# Altium PCB DC_Switch_2_5V.PcbDoc (part 1 of 2)
Units mm, origin at the board's own origin, x right, y up, seen from the top; angles counter-clockwise.
Board outline 119.38 x 91.44 mm, 2 copper layers (Top Layer, Bottom Layer); 24 components, 104 nets, 306 pads, 149 vias.
Unrouted connection lines stored in the file: 1.
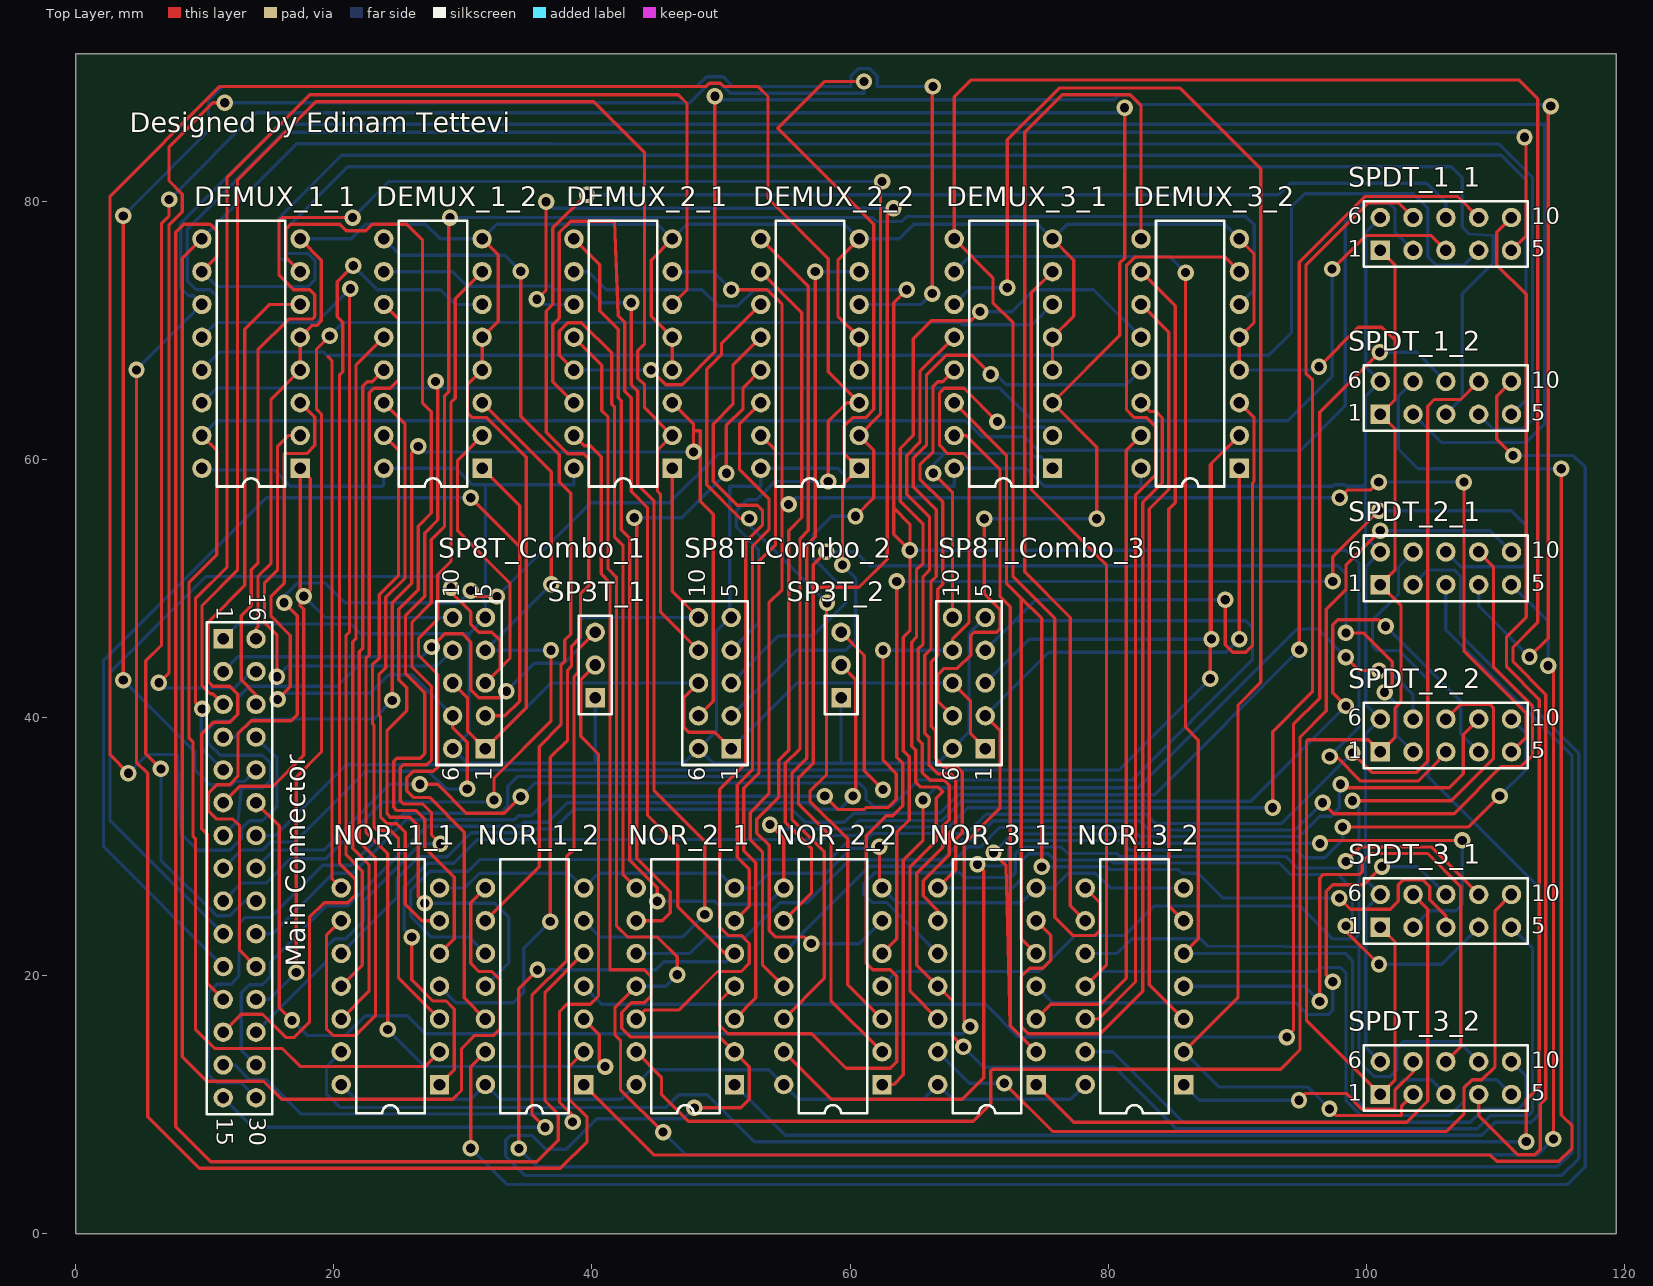
[diagram p0: Top Layer view]
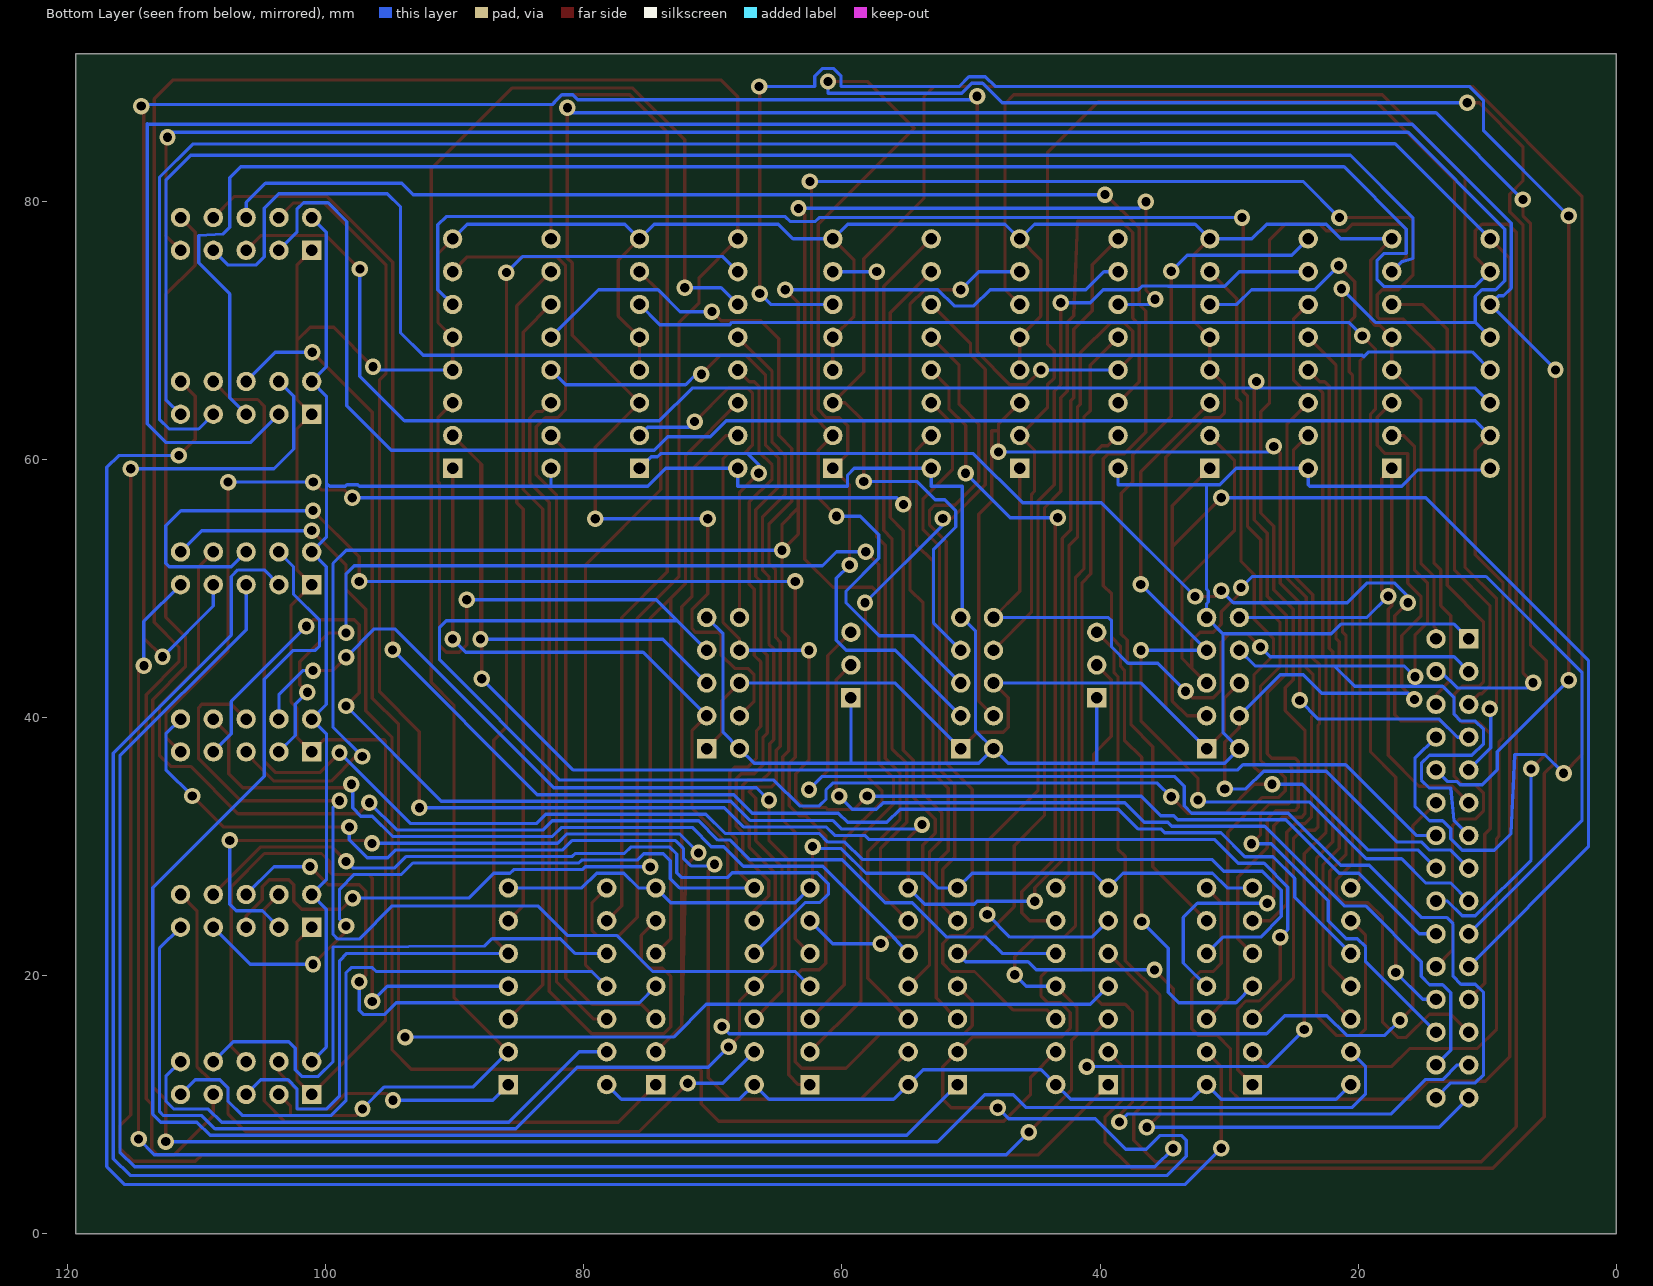
[diagram p1: Bottom Layer view, seen from below]

## Layer stack, top to bottom
Top Solder: solder mask 0.0102, Solder Resist, Dk 3.5
Top Layer: signal copper 0.0356
Dielectric 1: dielectric 0.32, FR-4, Dk 4.8
Bottom Layer: signal copper 0.0356
Bottom Solder: solder mask 0.0102, Solder Resist, Dk 3.5

## Board outline
0,0 119.38,0 119.38,91.44 0,91.44

## Design rules (kind name [scope] priority, off if disabled: settings)
Clearance [All] p1: gap=0.254
PolygonConnect [All] p1: connectstyle=Relief reliefconductorwidth=0.254 reliefentries=4 polygonreliefangle="90 Angle" airgapwidth=0.254
RoomDefinition DC_Switch_2 [InComponentClass('DC_Switch_2')] p1: confinementstyle=ConfineIn formatcopy=TRUE lockcomponents=FALSE outline 0,0 119.38,0 119.38,91.44 0,91.44
RoutingVias [All] p1: holewidth=0.711 width=1.27 viastyle="Through Hole" minholewidth=0.711 minwidth=1.27 maxholewidth=0.711 maxwidth=1.27
SolderMaskExpansion [All] p1: expansion=0.102
Width [All] p1: maxlimit=0.254 minlimit=0.254 preferedwidth=0.254
30 further rules are at their usual default settings.

## Components (designator, comment, footprint, x,y, rotation, side; value= is the part's Value field where it differs from the comment)
DEMUX_1_1 "CD54HCT238" J016D 13.589,68.199 r90 top
DEMUX_1_2 "CD54HCT238" J016D 27.686,68.199 r90 top
DEMUX_2_1 "CD54HCT238" J016D 42.418,68.199 r90 top
DEMUX_2_2 "CD54HCT238" J016D 56.896,68.199 r90 top
DEMUX_3_1 "CD54HCT238" J016D 71.882,68.199 r90 top
DEMUX_3_2 "CD54HCT238" J016D 86.36,68.199 r90 top
"Main Connector" "Arduino Pins" HDR2X15_CEN 11.43,46.101 r270 top
NOR_1_1 "SN74HC02N" N014 24.384,19.177 r90 top
NOR_1_2 "SN74HC02N" N014 35.56,19.177 r90 top
NOR_2_1 "SN74HC02N" N014 47.244,19.177 r90 top
NOR_2_2 "SN74HC02N" N014 58.674,19.177 r90 top
NOR_3_1 "SN74HC02N" N014 70.612,19.177 r90 top
NOR_3_2 "SN74HC02N" N014 82.042,19.177 r90 top
SP3T_1 "Cntrl" HDR1X3 40.259,41.529 r90 top
SP3T_2 "Cntrl" HDR1X3 59.309,41.529 r90 top
SP8T_Combo_1 "Cntrl" HDR2X5_CEN 31.75,37.592 r90 top
SP8T_Combo_2 "Cntrl" HDR2X5_CEN 50.8,37.592 r90 top
SP8T_Combo_3 "Cntrl" HDR2X5_CEN 70.485,37.592 r90 top
SPDT_1_1 "Cntrl" HDR2X5_CEN 101.092,76.2 r0 top
SPDT_1_2 "Cntrl" HDR2X5_CEN 101.092,63.5 r0 top
SPDT_2_1 "Cntrl" HDR2X5_CEN 101.092,50.292 r0 top
SPDT_2_2 "Cntrl" HDR2X5_CEN 101.092,37.338 r0 top
SPDT_3_1 "Cntrl" HDR2X5_CEN 101.092,23.749 r0 top
SPDT_3_2 "Cntrl" HDR2X5_CEN 101.092,10.795 r0 top

## Footprints (in the part's own frame and the unit in brackets; to place one, negate y for a bottom-side part, rotate by r counter-clockwise, add the part's x,y. Pads: shape width x height; smd on the part's side, far side on the other; paste and mask are expansions set on the pad)
HDR1X3 [mm] "Connector; Header; 3 Position"
  rect 1.5x1.5 hole 0.9: 1(0,0)
  round 1.5 hole 0.9: 2(2.54,0) 3(5.08,0)
  silkscreen extent -1.27,-1.27 6.35,1.27
HDR2X5_CEN [mm] "Connector; Header; 5x2 Position"
  rect 1.5x1.5 hole 0.9: 1(0,0)
  round 1.5 hole 0.9: 2(2.54,0) 3(5.08,0) 4(7.62,0) 5(10.16,0) 6(0,2.54) 7(2.54,2.54) 8(5.08,2.54) 9(7.62,2.54) 10(10.16,2.54)
  silkscreen extent -1.27,-1.27 11.43,3.81
HDR2X15_CEN [mm] "Connector; Header; 15x2 Position"
  rect 1.5x1.5 hole 0.9: 1(0,0)
  round 1.5 hole 0.9: 2(2.54,0) 3(5.08,0) 4(7.62,0) 5(10.16,0) 6(12.7,0) 7(15.24,0) 8(17.78,0) 9(20.32,0) 10(22.86,0) 11(25.4,0) 12(27.94,0) 13(30.48,0) 14(33.02,0) 15(35.56,0) 16(0,2.54) 17(2.54,2.54) 18(5.08,2.54) 19(7.62,2.54) 20(10.16,2.54) 21(12.7,2.54) 22(15.24,2.54) 23(17.78,2.54) 24(20.32,2.54) 25(22.86,2.54) 26(25.4,2.54) 27(27.94,2.54) 28(30.48,2.54) 29(33.02,2.54) 30(35.56,2.54)
  silkscreen extent -1.27,-1.27 36.83,3.81
J016D [mm] "DIP; 16 Leads; Row Spacing 7.62 mm; Pitch 2.54 mm"
  rect 1.5x1.5 hole 0.9: 1(-8.89,-3.81)
  round 1.5 hole 0.9: 2(-6.35,-3.81) 3(-3.81,-3.81) 4(-1.27,-3.81) 5(1.27,-3.81) 6(3.81,-3.81) 7(6.35,-3.81) 8(8.89,-3.81) 9(8.89,3.81) 10(6.35,3.81) 11(3.81,3.81) 12(1.27,3.81) 13(-1.27,3.81) 14(-3.81,3.81) 15(-6.35,3.81) 16(-8.89,3.81)
  silkscreen extent -10.3,-2.65 10.3,2.65
N014 [mm] "DIP; 14 Leads; Row Spacing 7.62 mm; Pitch 2.54 mm"
  rect 1.5x1.5 hole 0.9: 1(-7.62,-3.81)
  round 1.5 hole 0.9: 2(-5.08,-3.81) 3(-2.54,-3.81) 4(0,-3.81) 5(2.54,-3.81) 6(5.08,-3.81) 7(7.62,-3.81) 8(7.62,3.81) 9(5.08,3.81) 10(2.54,3.81) 11(0,3.81) 12(-2.54,3.81) 13(-5.08,3.81) 14(-7.62,3.81)
  silkscreen extent -9.85,-2.65 9.85,2.65

## Part data
DEMUX_1_1 DEMUX_1_2 DEMUX_2_1 DEMUX_2_2 DEMUX_3_1 DEMUX_3_2: library part SN54HC238J, "3-Line to 8-Line Decoder / Demultiplexer"
"Main Connector": library part "Header 15X2A", "Header, 15-Pin, Dual row"
NOR_1_1 NOR_1_2 NOR_2_1 NOR_2_2 NOR_3_1 NOR_3_2: "Quadruple 2-Input Positive-NOR Gate"
SP3T_1 SP3T_2: library part "Header 3", "Header, 3-Pin"
SP8T_Combo_1 SP8T_Combo_2 SP8T_Combo_3 SPDT_1_1 SPDT_1_2 SPDT_2_1 SPDT_2_2 SPDT_3_1 SPDT_3_2: library part "Header 5X2A", "Header, 5-Pin, Dual row"

## Via types
v1: diameter 1.27, hole 0.711, Top Layer to Bottom Layer, 149 vias

## Nets (pads, with @x,y where several pads share a name; then routed paths per layer and width w, separated by ;. In a path a pad name is that pad's centre, name@x,y a point inside that pad or via, vN(x,y) a via of type N, cw(c..) or ccw(c..) an arc to the next point about the centre after c; other vN are vias at no path point)
GND: NOR_1_1.7 NOR_1_2.7 NOR_2_1.7 NOR_2_2.7 NOR_3_1.7 NOR_3_2.7 | length 65.9
  Top Layer w0.254: v1(62.281,29.997) 62.281,27 NOR_2_2.7@62.484,26.797
  Bottom Layer w0.254: NOR_1_1.7@28.194,26.797 30.148,26.797 31.291,27.94 38.227,27.94 NOR_1_2.7@39.37,26.797 40.513,27.94 49.911,27.94 NOR_2_1.7@51.054,26.797 52.578,26.797 53.721,27.94 58.141,27.94 60.046,29.845 62.128,29.845 v1(62.281,29.997) ; NOR_2_2.7@62.484,26.797 63.627,25.654 73.279,25.654 NOR_3_1.7@74.422,26.797 75.768,26.797 76.911,27.94 79.019,27.94 80.162,26.797 NOR_3_2.7@85.852,26.797
NetDEMUX_1_1_1: "Main Connector.6" DEMUX_1_1.1 SP8T_Combo_1.10 | length 52.8
  Top Layer w0.254: 11.43,33.401 12.7,34.671 15.291,34.671 17.684,37.064 17.684,48.387 17.399,48.672 DEMUX_1_1.1@17.399,59.309 18.186,58.522 18.186,49.911 v1(17.678,49.403)
  Bottom Layer w0.254: v1(17.678,49.403) 19.329,47.752 SP8T_Combo_1.10@29.21,47.752
NetDEMUX_1_1_2: "Main Connector.7" DEMUX_1_1.2 SP8T_Combo_1.9 | length 64.1
  Top Layer w0.254: v1(15.596,43.155) 15.596,46.406 14.63,47.371 14.63,50.419 15.646,51.435 15.646,61.036 16.459,61.849 DEMUX_1_1.2@17.399,61.849
  Bottom Layer w0.254: 11.43,30.861 12.573,32.004 12.827,34.532 14.478,34.532 15.101,35.155 15.101,36.449 14.478,37.072 11.188,37.072 10.287,37.973 10.287,39.091 10.922,39.726 12.04,39.726 12.573,40.259 12.573,41.529 13.462,42.418 20.269,42.418 21.844,43.993 ; v1(15.596,43.155) 16.434,43.993 21.844,43.993 ; SP8T_Combo_1.9@29.21,45.212 27.991,43.993 21.844,43.993
NetDEMUX_1_1_3: "Main Connector.8" DEMUX_1_1.3 SP8T_Combo_1.7 | length 71.3
  Top Layer w0.254: v1(15.646,41.402) 16.625,42.381 16.625,46.355 15.138,47.842 15.138,49.403 16.154,50.419 16.154,60.452 17.895,60.452 18.53,61.087 18.53,63.258 DEMUX_1_1.3@17.399,64.389 ; SP8T_Combo_1.7@29.21,40.132 29.21,39.218 30.341,38.087 v1(30.341,34.468)
  Bottom Layer w0.254: 11.43,28.321 12.839,29.73 14.465,29.73 15.088,30.353 16.993,30.353 22.479,35.839 27.33,35.839 28.702,34.468 v1(30.341,34.468) ; v1(15.646,41.402) 16.129,41.885 22.835,41.885 24.257,43.307 26.035,43.307 SP8T_Combo_1.7@29.21,40.132
NetDEMUX_1_1_4: "Main Connector.16" DEMUX_1_1.4 DEMUX_1_1.5 DEMUX_1_1.8 DEMUX_1_2.4 DEMUX_1_2.5 DEMUX_1_2.8 DEMUX_2_1.4 DEMUX_2_1.5 DEMUX_2_1.8 DEMUX_2_2.4 DEMUX_2_2.5 DEMUX_2_2.8 DEMUX_3_1.4 DEMUX_3_1.5 DEMUX_3_1.8 DEMUX_3_2.4 DEMUX_3_2.5 DEMUX_3_2.8 SP8T_Combo_1.1 SP8T_Combo_1.8 SP8T_Combo_2.1 SP8T_Combo_2.8 SP8T_Combo_3.1 SP8T_Combo_3.8 SPDT_1_1.1 SPDT_1_2.1 SPDT_2_1.1 SPDT_2_2.1 SPDT_3_1.1 SPDT_3_2.1 | length 366.1
  Top Layer w0.254: 13.97,46.101 13.97,46.863 14.122,47.015 14.122,50.927 15.138,51.943 15.138,64.668 DEMUX_1_1.4@17.399,66.929 DEMUX_1_1.5@17.399,69.469 18.3,70.37 18.669,70.37 19.038,70.739 19.038,75.45 DEMUX_1_1.8@17.399,77.089 ; SP8T_Combo_1.8@29.21,42.672 30.353,41.529 30.353,38.989 SP8T_Combo_1.1@31.75,37.592 34.913,40.755 34.913,60.185 31.852,63.246 30.734,63.246 30.353,63.627 30.353,65.786 DEMUX_1_2.4@31.496,66.929 DEMUX_1_2.5@31.496,69.469 32.741,70.714 32.741,75.844 DEMUX_1_2.8@31.496,77.089 ; DEMUX_2_1.4@46.228,66.929 DEMUX_2_1.5@46.228,69.469 44.589,71.108 44.589,75.45 DEMUX_2_1.8@46.228,77.089 ; SP8T_Combo_2.8@48.26,42.672 47.117,41.529 47.117,39.243 47.498,38.862 49.53,38.862 SP8T_Combo_2.1@50.8,37.592 ; DEMUX_2_2.4@60.706,66.929 DEMUX_2_2.5@60.706,69.469 59.067,71.108 59.067,75.45 DEMUX_2_2.8@60.706,77.089 ; SP8T_Combo_3.8@67.945,42.672 69.342,41.275 69.342,38.735 SP8T_Combo_3.1@70.485,37.592 ; DEMUX_3_1.4@75.692,66.929 DEMUX_3_1.5@75.692,69.469 77.331,71.108 77.331,75.45 DEMUX_3_1.8@75.692,77.089 ; DEMUX_3_2.4@90.17,66.929 DEMUX_3_2.5@90.17,69.469 91.306,70.605 91.306,75.953 DEMUX_3_2.8@90.17,77.089 ; v1(96.342,67.183) 99.39,70.231 101.219,70.231 102.235,69.215 ; SPDT_3_1.1@101.092,23.749 102.235,22.606 102.235,11.938 SPDT_3_2.1@101.092,10.795 95.377,16.51 95.377,38.171 95.484,38.278 100.152,38.278 SPDT_2_2.1@101.092,37.338 102.235,38.481 102.235,40.742 102.692,41.199 102.692,48.692 SPDT_2_1.1@101.092,50.292 102.235,51.435 102.235,62.357 SPDT_1_2.1@101.092,63.5 102.235,64.643 102.235,69.215 ; SPDT_1_1.1@101.092,76.2 102.235,75.057 102.235,69.215
  Bottom Layer w0.254: DEMUX_1_1.8@17.399,77.089 21.347,77.089 22.487,78.229 27.105,78.229 28.245,77.089 DEMUX_1_2.8@31.496,77.089 32.639,78.232 45.085,78.232 DEMUX_2_1.8@46.228,77.089 47.371,78.232 59.563,78.232 DEMUX_2_2.8@60.706,77.089 63.805,77.089 64.948,78.232 74.549,78.232 DEMUX_3_1.8@75.692,77.089 76.835,78.232 89.027,78.232 DEMUX_3_2.8@90.17,77.089 ; SP8T_Combo_1.1@31.75,37.592 36.83,42.672 SP8T_Combo_2.8@48.26,42.672 ; SP8T_Combo_2.1@50.8,37.592 55.88,42.672 SP8T_Combo_3.8@67.945,42.672 ; DEMUX_3_2.4@90.17,66.929 96.088,66.929 v1(96.342,67.183)
NetDEMUX_1_1_6: "Main Connector.12" DEMUX_1_1.6 | length 62.5
  Top Layer w0.254: 11.43,18.161 10.185,19.406 10.185,30.964 9.779,31.37 9.779,38.735 10.668,39.624 11.938,39.624 12.561,40.247 12.561,41.795 11.938,42.418 10.629,42.418 10.299,42.748 10.299,47.434 13.106,50.241 13.106,70.079 15.037,72.009 DEMUX_1_1.6@17.399,72.009
NetDEMUX_1_1_7: DEMUX_1_1.7 NOR_1_2.11 SPDT_1_2.5 | length 207.4
  Top Layer w0.254: DEMUX_1_1.7@17.399,74.549 16.268,75.68 16.268,77.851 16.649,78.232 20.455,78.232 20.966,77.721 22.487,77.721 22.998,78.232 25.654,78.232 26.873,77.013 26.873,64.389 27.559,63.703 27.559,55.847 26.543,54.831 26.543,49.897 25.044,48.399 25.044,42.925 25.654,42.315 25.654,40.537 24.13,39.013 24.13,32.537 24.384,32.283 25.883,32.283 26.543,31.623 26.543,26.111 v1(27.051,25.603)
  Bottom Layer w0.254: DEMUX_1_1.7@17.399,74.549 16.637,75.311 15.76,75.565 15.76,78.728 20.598,83.566 110.453,83.566 112.383,81.636 112.383,64.631 SPDT_1_2.5@111.252,63.5 ; v1(27.051,25.603) 32.461,25.603 33.553,24.511 33.553,20.98 NOR_1_2.11@31.75,19.177
NetDEMUX_1_1_9: DEMUX_1_1.9 NOR_1_2.8 SPDT_1_2.4 | length 238
  Top Layer w0.254: DEMUX_1_1.9@9.779,77.089 8.267,75.577 8.267,13.704 10.16,11.811 14.554,11.811 15.951,10.414 29.21,10.414 29.896,11.1 29.896,14.351 30.912,15.367 32.385,15.367 32.893,15.875 32.893,19.685 32.258,20.32 31.242,20.32 30.607,20.955 30.607,25.654 NOR_1_2.8@31.75,26.797
  Bottom Layer w0.254: DEMUX_1_1.9@9.779,77.089 17.145,84.455 36.855,84.455 110.309,84.428 112.891,81.846 112.891,63.107 112.141,62.357 109.855,62.357 SPDT_1_2.4@108.712,63.5
NetDEMUX_1_1_10: DEMUX_1_1.10 NOR_1_2.5 SPDT_1_2.3 | length 254.9
  Top Layer w0.254: DEMUX_1_1.10@9.779,74.549 10.922,75.692 10.922,77.724 10.414,78.232 8.382,78.232 7.759,77.609 7.759,8.306 10.477,5.588 35.738,5.588 37.389,7.239 37.389,9.271 36.373,10.287 36.373,18.72 NOR_1_2.5@39.37,21.717
  Bottom Layer w0.254: DEMUX_1_1.10@9.779,74.549 10.922,73.406 18.034,73.406 18.542,73.914 18.542,75.438 18.034,75.946 16.268,75.971 16.268,77.851 21.094,82.677 106.604,82.677 107.442,81.839 107.442,77.978 107.95,77.47 109.843,77.343 109.843,75.223 107.442,72.822 107.442,64.77 SPDT_1_2.3@106.172,63.5
NetDEMUX_1_1_11: DEMUX_1_1.11 NOR_1_2.2 SPDT_1_2.2 | length 261
  Top Layer w0.254: v1(4.711,66.941) 4.711,36.547 5.588,35.67 5.588,9.068 9.581,5.075 37.561,5.075 39.624,7.137 39.624,9.017 38.227,10.414 38.227,12.954 NOR_1_2.2@39.37,14.097
  Bottom Layer w0.254: v1(4.711,66.941) DEMUX_1_1.11@9.779,72.009 9.112,72.676 8.743,72.676 8.14,73.279 8.14,78.295 15.824,85.979 113.792,85.979 113.826,86.013 113.826,62.747 112.395,61.316 105.816,61.316 SPDT_1_2.2@103.632,63.5
NetDEMUX_1_1_12: DEMUX_1_1.12 NOR_1_1.11 SPDT_1_1.5 | length 194.2
  Top Layer w0.254: NOR_1_1.11@20.574,19.177 22.213,20.816 22.213,28.104 20.955,29.362 20.955,46.38 21.221,46.646 21.221,73.164 v1(21.285,73.228) ; SPDT_1_1.5@111.252,76.2 112.395,77.343 112.383,77.355 112.383,84.848 v1(112.268,84.963)
  Bottom Layer w0.254: DEMUX_1_1.12@9.779,69.469 10.922,70.612 ; v1(21.285,73.228) 18.669,70.612 10.922,70.612 ; v1(112.268,84.963) 112.649,85.344 16.141,85.344 8.648,77.851 8.648,73.851 9.359,73.14 10.414,73.14 10.922,72.632 10.922,70.612
NetDEMUX_1_1_13: DEMUX_1_1.13 NOR_1_1.8 SPDT_1_1.4 | length 157.2
  Top Layer w0.254: 19.558,67.945 19.863,67.64 19.863,27.508 NOR_1_1.8@20.574,26.797
  Bottom Layer w0.254: DEMUX_1_1.13@9.779,66.929 11.176,68.326 19.177,68.326 19.558,67.945 19.685,68.072 92.456,68.072 94.209,69.825 94.209,79.578 95.225,80.594 103.657,80.594 104.775,79.477 104.775,75.692 105.41,75.057 107.569,75.057 SPDT_1_1.4@108.712,76.2
NetDEMUX_1_1_14: DEMUX_1_1.14 NOR_1_1.5 SPDT_1_1.3 | length 161.3
  Top Layer w0.254: v1(27.889,66.04) 28.067,65.862 28.067,55.305 27.051,54.289 27.051,49.389 25.552,47.891 25.552,43.434 27.051,41.935 27.051,37.211 26.695,36.855 24.892,36.855 24.638,36.601 24.638,33.045 24.892,32.791 26.391,32.791 27.051,32.131 27.051,29.921 29.337,27.635 29.337,22.86 NOR_1_1.5@28.194,21.717 ; v1(97.358,74.752) 99.949,77.343 105.029,77.343 SPDT_1_1.3@106.172,76.2
  Bottom Layer w0.254: DEMUX_1_1.14@9.779,64.389 10.922,65.532 27.381,65.532 ; v1(27.889,66.04) 27.381,65.532 ; v1(97.358,74.752) 97.358,66.446 93.904,62.992 74.156,62.992 71.616,65.532 27.381,65.532
NetDEMUX_1_1_15: DEMUX_1_1.15 NOR_1_1.2 SPDT_1_1.2 | length 182.3
  Top Layer w0.254: DEMUX_1_1.15@9.779,61.849 10.922,60.706 10.922,52.596 8.775,50.449 8.775,38.418 9.094,38.099 9.094,30.796 9.283,30.607 9.283,15.863 10.795,14.351 16.027,14.351 17.424,12.954 27.051,12.954 NOR_1_1.2@28.194,14.097
  Bottom Layer w0.254: DEMUX_1_1.15@9.779,61.849 10.922,62.992 68.961,62.992 70.206,61.747 73.52,61.747 74.549,60.718 94.932,60.718 98.374,64.16 98.374,78.435 99.822,79.883 101.727,79.883 102.235,79.375 102.235,77.597 SPDT_1_1.2@103.632,76.2
NetDEMUX_1_1_16: "Main Connector.1" DEMUX_1_1.16 DEMUX_1_2.16 DEMUX_2_1.16 DEMUX_2_2.16 DEMUX_3_1.16 DEMUX_3_2.16 SP3T_1.1 SP3T_2.1 SP8T_Combo_1.5 SP8T_Combo_1.6 SP8T_Combo_2.5 SP8T_Combo_2.6 SP8T_Combo_3.5 SP8T_Combo_3.6 SPDT_1_1.6 SPDT_1_2.6 SPDT_2_1.6 SPDT_2_2.6 SPDT_3_1.6 SPDT_3_2.6 | length 290.6
  Bottom Layer w0.254: DEMUX_1_1.16@9.652,59.182 15.367,59.182 16.637,57.912 23.749,57.912 23.876,58.039 DEMUX_1_2.16@23.876,59.309 29.464,59.309 29.464,59.302 30.727,58.039 ; 11.43,46.101 12.573,47.244 21.336,47.244 22.098,46.482 30.48,46.482 ; 31.115,58.039 30.727,58.039 ; 31.623,58.039 38.608,58.039 DEMUX_2_1.16@38.608,59.309 ; SP3T_1.1@40.259,41.529 40.259,36.461 ; 49.657,39.243 49.657,46.736 50.673,47.752 50.673,57.912 53.086,57.912 DEMUX_2_2.16@53.086,59.309 59.055,59.309 59.575,58.789 59.575,57.912 68.072,57.912 DEMUX_3_1.16@68.072,59.309 73.653,59.309 74.041,58.921 74.784,58.178 74.791,58.178 75.057,57.912 82.677,57.912 97.395,57.912 97.522,58.039 98.363,58.039 98.49,57.912 99.695,57.912 99.949,58.166 ; 49.657,46.609 49.657,38.989 SP8T_Combo_2.6@48.26,37.592 ; SP3T_2.1@59.309,41.529 59.309,36.449 ; SP8T_Combo_3.5@70.485,47.752 69.215,46.482 69.215,38.862 SP8T_Combo_3.6@67.945,37.592 66.802,36.449 59.309,36.449 ; 82.55,58.039 DEMUX_3_2.16@82.55,59.309 ; SPDT_3_2.6@101.092,13.335 99.961,14.466 99.961,25.158 SPDT_3_1.6@101.092,26.289 99.949,27.432 99.949,38.735 SPDT_2_2.6@101.092,39.878 99.961,41.009 99.961,51.701 SPDT_2_1.6@101.092,52.832 99.949,53.975 99.949,58.166 ; SPDT_1_1.6@101.092,78.74 99.961,77.609 99.961,67.171 SPDT_1_2.6@101.092,66.04 99.949,64.897 99.949,58.166 ; 30.48,46.482 SP8T_Combo_1.5@31.75,47.752 31.75,48.83 31.623,48.957 31.623,49.798 31.75,49.925 31.75,58.039 30.727,58.039 ; 30.48,46.482 30.48,38.862 SP8T_Combo_1.6@29.21,37.592 30.341,36.461 40.259,36.461 ; 40.259,36.461 47.129,36.461 SP8T_Combo_2.6@48.26,37.592 ; SP8T_Combo_2.6@48.26,37.592 49.168,36.684 49.403,36.449 59.309,36.449
NetDEMUX_1_2_1: "Main Connector.11" DEMUX_1_2.1 SP8T_Combo_1.2 | length 89
  Top Layer w0.254: v1(30.607,57.023) 34.405,53.225 ; DEMUX_1_2.1@31.496,59.309 34.405,56.4 34.405,53.225 ; SP8T_Combo_1.2@31.75,40.132 33.262,40.132 34.405,41.275 34.405,53.225
  Bottom Layer w0.254: 11.43,20.701 2.159,29.972 2.159,44.425 14.757,57.023 v1(30.607,57.023)
NetDEMUX_1_2_2: "Main Connector.10" DEMUX_1_2.2 SP8T_Combo_1.3 | length 84.6
  Top Layer w0.254: v1(29.083,50.063) 29.083,49.708 30.607,48.184 30.607,47.244 31.242,46.609 32.258,46.609 32.893,45.974 32.893,43.815 ; DEMUX_1_2.2@31.496,61.849 29.591,59.944 29.591,54.471 33.655,50.407 33.655,44.577 32.893,43.815 ; SP8T_Combo_1.3@31.75,42.672 32.893,43.815
  Bottom Layer w0.254: 11.43,23.241 2.667,32.004 2.667,43.5 10.094,50.927 28.219,50.927 v1(29.083,50.063)
NetDEMUX_1_2_3: "Main Connector.9" DEMUX_1_2.3 SP8T_Combo_1.4 | length 66.3
  Top Layer w0.254: DEMUX_1_2.3@31.496,64.389 36.857,59.028 v1(36.857,50.319) ; v1(32.416,33.604) 32.416,35.286 36.83,39.7 v1(36.83,45.212)
  Bottom Layer w0.254: 11.43,25.781 12.827,27.178 14.765,27.178 16.644,29.058 19.362,29.058 23.756,33.452 32.263,33.452 v1(32.416,33.604) ; v1(36.83,45.212) SP8T_Combo_1.4@31.75,45.212 v1(36.857,50.319)
NetDEMUX_1_2_6: "Main Connector.13" DEMUX_1_2.6 | length 82.2
  Top Layer w0.254: 11.43,15.621 12.827,17.018 14.478,17.018 16.281,15.215 16.942,15.215 18.11,16.383 18.11,24.511 19.253,25.654 21.082,25.654 21.705,26.277 21.705,27.419 20.447,28.677 20.447,66.548 20.701,66.802 20.701,70.637 20.269,71.069 20.269,73.762 v1(21.514,75.006)
  Bottom Layer w0.254: v1(21.514,75.006) 23.368,73.152 28.27,73.152 29.413,72.009 DEMUX_1_2.6@31.496,72.009
NetDEMUX_1_2_7: DEMUX_1_2.7 NOR_1_2.12 | length 65.8
  Top Layer w0.254: DEMUX_1_2.7@31.496,74.549 29.413,72.466 29.413,64.745 29.083,64.414 29.083,52.095 28.067,51.079 28.067,47.625 26.568,46.126 26.568,44.806 28.079,43.295 28.079,36.195 27.723,35.839 26.162,35.839 25.654,35.331 25.654,34.315 26.162,33.807 27.419,33.807 30.099,31.127 30.099,18.288 NOR_1_2.12@31.75,16.637
NetDEMUX_1_2_9: DEMUX_1_2.9 NOR_1_2.9 | length 66.3
  Top Layer w0.254: NOR_1_2.9@31.75,24.257 35.916,28.423 35.916,37.744 37.604,39.433 37.604,44.063 37.904,44.363 37.904,46.008 38.354,46.458 38.354,57.379 37.477,58.256 37.477,60.357 34.492,63.341 v1(34.492,74.582)
  Bottom Layer w0.254: DEMUX_1_2.9@23.876,77.089 25.146,75.819 33.255,75.819 v1(34.492,74.582)
NetDEMUX_1_2_10: DEMUX_1_2.10 NOR_1_2.6 | length 80.6
  Top Layer w0.254: v1(43.053,72.136) 43.053,65.799 43.561,65.291 43.561,58.024 44.816,56.769 44.816,34.331 48.743,30.404 v1(48.743,24.74)
  Bottom Layer w0.254: DEMUX_1_2.10@23.876,74.549 29.222,74.549 30.353,73.418 34.722,73.418 34.735,73.431 36.754,73.431 37.033,73.152 39.751,73.152 40.767,72.136 v1(43.053,72.136) ; NOR_1_2.6@39.37,24.257 40.64,22.987 46.99,22.987 v1(48.743,24.74)
NetDEMUX_1_2_11: DEMUX_1_2.11 NOR_1_2.3 | length 81.5
  Top Layer w0.254: DEMUX_1_2.11@23.876,72.009 25.019,70.866 25.019,66.167 24.372,65.52 23.114,65.52 22.745,65.151 22.745,44.843 22.491,44.589 22.491,31.128 24.181,29.439 v1(24.181,15.824) ; NOR_1_2.3@39.37,16.637 40.577,15.431 40.577,13.399 v1(41.021,12.954)
  Bottom Layer w0.254: v1(24.181,15.824) 27.051,12.954 v1(41.021,12.954)
NetDEMUX_1_2_12: DEMUX_1_2.12 NOR_1_1.12 | length 55.2
  Top Layer w0.254: NOR_1_1.12@20.574,16.637 22.721,18.784 22.721,28.612 21.463,29.87 21.463,45.872 21.729,46.138 21.729,67.322 DEMUX_1_2.12@23.876,69.469
NetDEMUX_1_2_13: DEMUX_1_2.13 NOR_1_1.9 | length 65.1
  Top Layer w0.254: NOR_1_1.9@20.574,24.257 19.431,23.114 19.431,15.875 19.939,15.367 21.717,15.367 23.229,16.879 23.229,29.12 21.983,30.366 21.983,45.097 22.237,45.351 22.237,65.659 22.606,66.028 22.975,66.028 DEMUX_1_2.13@23.876,66.929
NetDEMUX_1_2_14: DEMUX_1_2.14 NOR_1_1.6 | length 44.8
  Top Layer w0.254: DEMUX_1_2.14@23.876,64.389 25.527,62.738 25.527,50.811 24.028,49.313 24.028,43.866 23.507,43.344 23.507,40.157 23.622,40.042 23.622,32.283 24.13,31.775 24.879,31.775 25.539,31.115 25.539,25.527 26.809,24.257 NOR_1_1.6@28.194,24.257
NetDEMUX_1_2_15: DEMUX_1_2.15 NOR_1_1.3 | length 49.3
  Top Layer w0.254: DEMUX_1_2.15@23.876,61.849 25.019,60.706 25.019,51.029 23.52,49.53 23.52,44.602 22.999,44.081 22.999,39.537 23.114,39.422 23.114,31.521 23.368,31.267 24.359,31.267 25.019,30.607 25.019,19.812 NOR_1_1.3@28.194,16.637
NetDEMUX_2_1_1: "Main Connector.2" DEMUX_2_1.1 SP8T_Combo_2.10 | length 58.4
  Top Layer w0.254: v1(27.584,45.466) 28.6,46.482 29.984,46.482 30.619,45.847 30.619,42.152 31.242,41.529 32.868,41.529 v1(33.376,42.037) ; DEMUX_2_1.1@46.228,59.309 46.228,49.784 SP8T_Combo_2.10@48.26,47.752
  Bottom Layer w0.254: 11.43,43.561 12.573,44.704 26.822,44.704 v1(27.584,45.466) ; v1(33.376,42.037) 35.535,44.196 37.846,44.196 39.116,45.466 39.116,47.498 39.37,47.752 SP8T_Combo_2.10@48.26,47.752
NetDEMUX_2_1_2: "Main Connector.3" DEMUX_2_1.2 SP8T_Combo_2.9 | length 119.9
  Top Layer w0.254: 11.43,41.021 10.606,41.845 10.414,41.845 9.791,42.468 9.791,48.682 12.548,51.439 12.548,81.661 18.593,87.706 40.132,87.706 44.081,83.757 44.081,68.945 43.561,68.425 43.561,66.307 44.081,65.787 44.081,63.996 DEMUX_2_1.2@46.228,61.849 45.085,60.706 45.085,57.516 45.324,57.277 45.324,48.148 SP8T_Combo_2.9@48.26,45.212
NetDEMUX_2_1_3: "Main Connector.4" DEMUX_2_1.3 SP8T_Combo_2.7 | length 84.3
  Top Layer w0.254: v1(24.536,41.326) 24.536,48.907 26.035,50.405 26.035,60.503 v1(26.543,61.011) ; DEMUX_2_1.3@46.228,64.389 47.879,62.738 47.879,62.23 ; v1(47.879,60.579) 47.879,62.23 ; SP8T_Combo_2.7@48.26,40.132 49.403,41.275 49.403,55.755 48.387,56.771 48.387,62.23 47.879,62.23
  Bottom Layer w0.254: 11.43,38.481 12.307,38.481 13.704,39.878 23.089,39.878 v1(24.536,41.326) ; v1(26.543,61.011) 26.975,60.579 v1(47.879,60.579)
NetDEMUX_2_1_6: "Main Connector.5" DEMUX_2_1.6 | length 102.5
  Top Layer w0.254: v1(9.804,40.665) 9.283,41.187 9.283,49.212 11.735,51.664 11.735,81.864 18.136,88.265 46.685,88.265 47.371,87.579 47.371,73.152 DEMUX_2_1.6@46.228,72.009
  Bottom Layer w0.254: v1(9.804,40.665) 9.728,40.589 9.728,37.643 11.43,35.941
NetDEMUX_2_1_7: DEMUX_2_1.7 NOR_2_2.11 SPDT_2_2.5 | length 141.6
  Top Layer w0.254: v1(50.8,73.152) 53.594,73.152 54.737,72.009 54.737,56.007 ; NOR_2_2.11@54.864,19.177 53.213,20.828 53.213,29.604 52.273,30.544 52.273,32.639 53.721,34.087 53.721,48.895 54.737,49.911 54.737,56.007 ; v1(55.245,56.515) 54.737,56.007 ; v1(97.942,57.023) 98.552,57.633 100.355,57.633 v1(100.965,58.242) ; v1(107.569,58.242) 107.569,45.161 112.383,40.347 112.383,38.469 SPDT_2_2.5@111.252,37.338
  Bottom Layer w0.254: DEMUX_2_1.7@46.228,74.549 49.403,74.549 v1(50.8,73.152) ; v1(55.245,56.515) 55.753,57.023 v1(97.942,57.023) ; v1(100.965,58.242) v1(107.569,58.242)
NetDEMUX_2_1_9: DEMUX_2_1.9 NOR_2_2.8 SPDT_2_2.4 | length 142.4
  Top Layer w0.254: DEMUX_2_1.9@38.608,77.089 40.615,75.082 40.615,71.526 42.037,70.104 42.037,64.783 42.266,64.554 42.266,54.534 42.923,53.876 42.923,28.947 45.06,26.81 v1(45.06,25.763) ; v1(53.797,31.699) 54.864,30.632 NOR_2_2.8@54.864,26.797 ; v1(98.425,40.894) 97.409,41.91 97.409,47.193 97.79,47.574 100.99,47.574 v1(101.498,47.066)
  Bottom Layer w0.254: v1(45.06,25.763) 49.524,25.763 49.759,25.527 53.594,25.527 NOR_2_2.8@54.864,26.797 ; v1(53.797,31.699) 54.127,31.369 60.071,31.369 60.731,32.029 67.132,32.029 68.619,33.516 91.047,33.516 v1(98.425,40.894) ; v1(101.498,47.066) 107.315,41.25 107.315,38.735 SPDT_2_2.4@108.712,37.338
NetDEMUX_2_1_10: DEMUX_2_1.10 NOR_2_2.5 SPDT_2_2.3 | length 146.8
  Top Layer w0.254: NOR_2_2.5@62.484,21.717 63.627,22.86 63.627,31.094 64.592,32.059 64.592,36.957 64.135,37.414 64.135,46.204 64.643,46.712 v1(64.643,52.959) ; v1(64.401,73.152) 63.385,72.136 63.385,56.249 ; v1(97.18,36.982) 97.687,36.982 99.592,35.077 104.013,35.077 105.639,36.703 105.639,36.805 SPDT_2_2.3@106.172,37.338 ; 63.385,56.249 63.385,54.217 v1(64.643,52.959) ; 63.385,56.249 64.643,54.991 v1(64.643,52.959)
  Bottom Layer w0.254: DEMUX_2_1.10@38.608,74.549 39.7,74.549 41.097,73.152 48.526,73.152 49.784,71.894 51.32,71.894 52.578,73.152 v1(64.401,73.152) ; v1(64.643,52.959) 98.425,52.959 99.441,51.943 99.441,39.243 v1(97.18,36.982)
NetDEMUX_2_1_11: DEMUX_2_1.11 NOR_2_2.2 SPDT_2_2.2 | length 172.8
  Top Layer w0.254: v1(35.738,72.415) 36.449,73.127 v1(36.449,79.959) ; v1(58.166,52.85) 57.15,51.834 57.15,49.584 ; NOR_2_2.2@62.484,14.097 58.522,18.059 58.522,30.787 56.007,33.301 56.007,35.306 57.15,36.449 57.15,49.584 ; v1(63.373,79.451) 62.877,78.955 62.877,52.272 60.697,50.092 57.658,50.092 57.15,49.584 ; v1(98.425,46.558) 99.771,46.558 102.006,44.323 102.006,42.545 v1(101.422,41.961)
  Bottom Layer w0.254: v1(35.738,72.415) 36.144,72.009 DEMUX_2_1.11@38.608,72.009 ; v1(36.449,79.959) 36.957,79.451 v1(63.373,79.451) ; v1(58.166,52.85) 60.427,52.85 61.511,51.765 97.79,51.765 98.425,51.13 v1(98.425,46.558) ; v1(101.422,41.961) 102.362,41.021 102.362,38.608 SPDT_2_2.2@103.632,37.338
NetDEMUX_2_1_12: DEMUX_2_1.12 NOR_2_1.11 SPDT_2_1.5 | length 185.6
  Top Layer w0.254: DEMUX_2_1.12@38.608,69.469 40.767,67.31 40.767,63.779 41.25,63.297 41.25,51.537 41.904,50.882 41.904,23.882 42.799,22.987 45.085,22.987 46.609,21.463 v1(46.609,20.066) ; NOR_2_1.11@43.434,19.177 41.783,17.526 41.783,15.418 42.215,14.986 42.215,11.176 v1(45.517,7.874) ; v1(114.097,44.018) 114.503,43.612 v1(114.503,7.341)
  Bottom Layer w0.254: NOR_2_1.11@43.434,19.177 45.72,19.177 v1(46.609,20.066) ; v1(45.517,7.874) 47.269,6.121 113.284,6.121 v1(114.503,7.341) ; SPDT_2_1.5@111.252,50.292 114.097,47.447 v1(114.097,44.018)
NetDEMUX_2_1_13: DEMUX_2_1.13 NOR_2_1.8 SPDT_2_1.4 | length 199.8
  Top Layer w0.254: DEMUX_2_1.13@38.608,66.929 37.477,68.06 37.477,69.938 38.14,70.6 39.179,70.6 41.529,68.25 41.529,64.275 41.758,64.046 41.758,53.96 42.415,53.303 42.415,27.816 NOR_2_1.8@43.434,26.797 ; v1(44.577,66.929) 45.72,65.786 46.99,65.786 49.53,68.326 v1(49.53,88.138) ; v1(112.649,44.704) 114.097,46.152 114.097,87.173 v1(114.3,87.376)
  Bottom Layer w0.254: DEMUX_2_1.13@38.608,66.929 v1(44.577,66.929) ; v1(49.53,88.138) 50.049,88.138 49.789,87.879 49.795,87.873 80.467,87.873 80.859,88.265 81.701,88.265 82.296,87.67 82.296,87.63 82.423,87.503 v1@114.3,87.503 ; SPDT_2_1.4@108.712,50.292 108.712,48.641 v1(112.649,44.704)
NetDEMUX_2_1_14: DEMUX_2_1.14 NOR_2_1.5 SPDT_2_1.3 | length 240.6
  Top Layer w0.254: v1(34.341,6.604) 34.341,18.999 v1(35.789,20.447) ; DEMUX_2_1.14@38.608,64.389 36.969,66.028 36.969,70.446 37.477,70.954 37.477,77.584 38.354,78.461 41.758,78.461 42.037,71.12 42.545,70.612 42.545,65.291 43.053,64.783 43.053,57.516 44.308,56.261 44.308,32.411 46.663,30.056 46.663,25.352 50.298,21.717 NOR_2_1.5@51.054,21.717
  Bottom Layer w0.254: v1(34.341,6.604) 35.763,5.182 114.808,5.182 115.951,6.325 115.951,37.033 106.172,46.812 SPDT_2_1.3@106.172,50.292 ; v1(35.789,20.447) 44.947,20.447 45.582,21.082 50.419,21.082 NOR_2_1.5@51.054,21.717
NetDEMUX_2_1_15: DEMUX_2_1.15 NOR_2_1.2 SPDT_2_1.2 | length 225.3
  Top Layer w0.254: DEMUX_2_1.15@38.608,61.849 39.395,61.062 39.878,61.062 40.716,60.223 40.716,51.123 41.396,50.443 41.396,20.453 41.402,20.447 44.069,20.447 44.577,19.939 44.577,18.415 44.069,17.907 43.065,17.907 42.303,17.145 42.303,15.939 43.002,15.24 49.911,15.24 NOR_2_1.2@51.054,14.097 52.197,12.954 52.197,10.414 51.537,9.754 v1(47.93,9.754)
  Bottom Layer w0.254: v1(47.93,9.754) 47.081,8.905 40.375,8.905 38.024,6.553 36.424,6.553 35.357,7.62 33.706,7.62 33.325,7.239 33.325,5.994 34.798,4.521 115.164,4.521 116.459,5.817 116.459,37.244 107.315,46.388 107.315,50.927 106.807,51.435 104.775,51.435 SPDT_2_1.2@103.632,50.292
NetDEMUX_2_2_1: "Main Connector.17" DEMUX_2_2.1 SP8T_Combo_2.2 | length 174
  Top Layer w0.254: v1(6.452,42.697) 7.239,43.485 7.239,78.174 8.255,79.19 8.255,80.558 7.239,81.574 7.239,84.245 10.624,87.63 v1(11.557,87.63) ; v1(59.411,51.816) 59.411,58.014 DEMUX_2_2.1@60.706,59.309 59.563,60.452 59.563,62.611 60.198,63.246 61.214,63.246 61.849,63.881 61.849,78.232 54.407,85.674 58.014,89.281 v1(61.087,89.281)
  Bottom Layer w0.254: v1(6.452,42.697) 6.858,42.291 12.319,42.291 13.589,43.561 13.97,43.561 ; v1(11.557,87.63) 47.585,87.63 49.109,89.154 49.951,89.154 50.724,88.381 61.087,88.381 v1(61.087,89.281) ; SP8T_Combo_2.2@50.8,40.132 55.88,45.212 59.665,45.212 60.44,45.987 60.44,50.787 v1(59.411,51.816)
NetDEMUX_2_2_2: "Main Connector.18" DEMUX_2_2.2 SP8T_Combo_2.3 | length 140.7
  Top Layer w0.254: 13.97,41.021 13.97,41.771 12.827,42.914 12.827,47.889 13.614,48.677 13.614,51.435 14.122,51.943 14.122,68.504 16.497,70.878 18.339,70.878 18.53,71.069 18.53,72.771 18.149,73.152 16.891,73.152 15.748,74.295 15.748,78.486 16.002,78.74 v1(21.463,78.74) ; v1(60.427,55.601) 61.849,57.023 61.849,60.706 DEMUX_2_2.2@60.706,61.849 62.357,63.5 62.357,81.407 v1(62.484,81.534)
  Bottom Layer w0.254: v1(21.463,78.74) 24.257,81.534 v1(62.484,81.534) ; SP8T_Combo_2.3@50.8,42.672 54.458,46.33 57.125,46.33 59.69,48.895 59.69,49.784 57.15,52.324 57.15,54.178 58.572,55.601 v1(60.427,55.601)